# Altium PCB USB PROGRAMMER.PCBDOC
Units mil, origin at the board's own origin, x right, y up, seen from the top; angles counter-clockwise.
Board outline 1375 x 700 mil, 2 copper layers (Top Layer, Bottom Layer); 37 components, 36 nets, 141 pads, 0 vias.
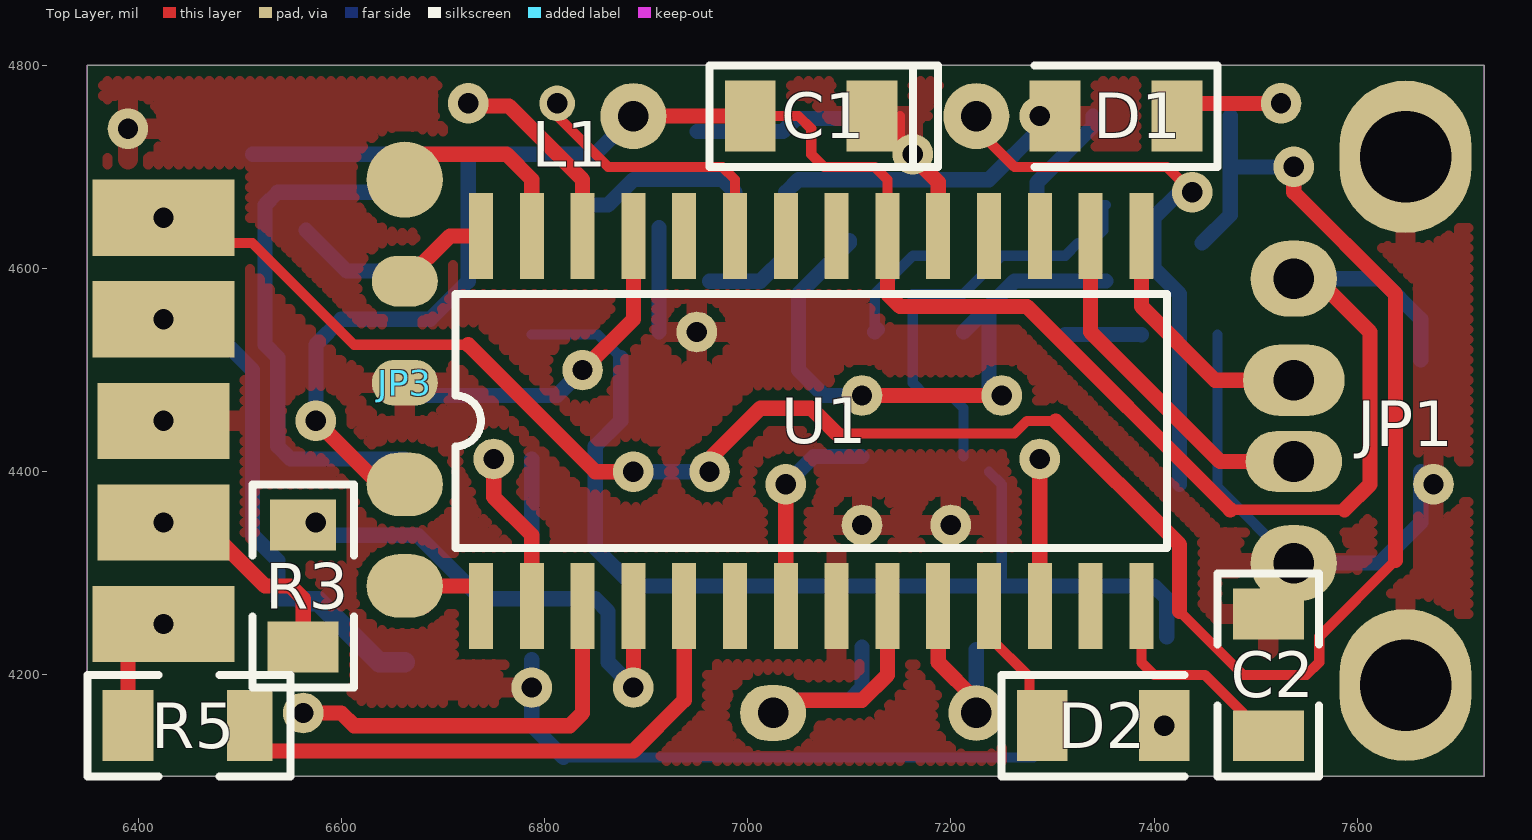
[diagram p0: Top Layer view]
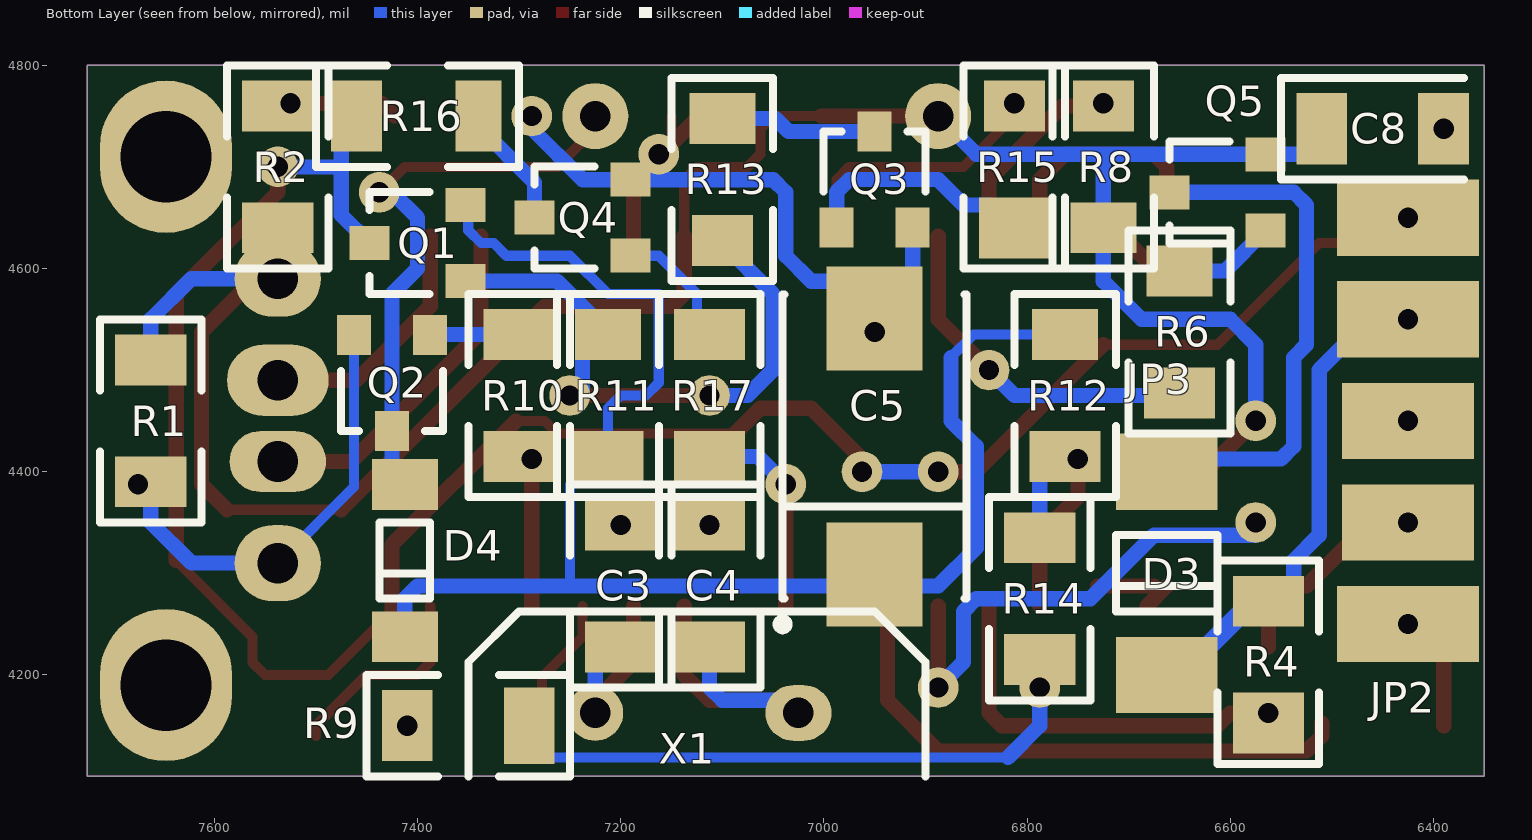
[diagram p1: Bottom Layer view, seen from below]

## Layer stack, top to bottom
Top Layer: signal copper 1.4
Dielectric: dielectric 12.6, FR-4, Dk 4.8
Bottom Layer: signal copper 1.4

## Board outline
7725,4100 7725,4800 6350,4800 6350,4100

## Design rules (kind name [scope] priority, off if disabled: settings)
Clearance [All] p1: gap=10
FabricationTestPointUsage TestPointUsage [All] p1: valid=0 allowmultiple=FALSE
FabricationTestpoint Testpoint [All] p1: side=3 testpointundercomponent=TRUE minsize=40 maxsize=100 preferedsize=60 minholesize=0 maxholesize=40 preferedholesize=32 testpointgrid=1 allowsidetop=TRUE allowsidebottom=TRUE usegrid=TRUE gridtolerance=0.01
PlaneConnect [All] p1: planeconnectstyle=Relief reliefexpansion=20 reliefentries=4 reliefconductorwidth=20 reliefairgap=10
PolygonConnect [All] p1: connectstyle=Relief reliefconductorwidth=20 reliefentries=4 polygonreliefangle="90 Angle"
RoutingVias [All] p1: holewidth=28 width=50 viastyle="Through Hole" minholewidth=28 minwidth=50 maxholewidth=28 maxwidth=50
SilkscreenOverComponentPads [All] p1: minsilkscreentomaskgap=10
SolderMaskExpansion [All] p1: expansion=4
Width [All] p1: maxlimit=20 minlimit=10 preferedwidth=20 bottomlayer_prefwidth=15 minimp=50.000000 maximp=50.000000 favimp=50.000000
24 further rules are at their usual default settings.

## Classes and differential pairs
component class 03: C5 D4 L1 Q1 Q2 Q3 Q4 R10 R11 R12 R13 R14 R15 R16 R17
component class 02: C8 D1 D2 D3 JP2 JP3 Q5 R1 R2 R3 R5 R6 R8 R9
component class 01: C1 C2 C3 C4 JP1 R4 U1 X1

## Components (designator, comment, footprint, x,y, rotation, side; value= is the part's Value field where it differs from the comment)
C1 "Cap" 1206NP#1 7062.5,4750 r180 top
C2 "Cap" 1206NP#1 7512.5,4200 r270 top
C3 "Cap" 1206NP#1 7200,4287.5 r270 bottom
C4 "Cap" 1206NP#1 7112.5,4287.5 r90 bottom
C5 "47uF" D 6950,4425 r90 bottom
C8 "Cap Pol" 1206P 6450,4737.5 r180 bottom
D1 "LED" 1206P 7362.5,4750 r180 top
D2 "LED" 1206p 7350,4150 r0 top
D3 "SS34" D64 6662.5,4300 r90 bottom
D4 "1N4148" DSMD1MM 7412.5,4312.5 r90 bottom
JP1 "USB MALE" USB_A_MALE 7537.5,4450 r90 top
JP2 "Header5x1" HDR5x1#1 6425,4650 r270 bottom
JP3 "Header5x1" HDR5x1#2 6662.5,4287.5 r90 bottom
L1 "" RES300TH 7075,4750 r0 top
Q1 "BC857" SOT23 7400,4625 r90 bottom
Q2 "BC848" SOT23 7425,4487.5 r0 bottom
Q3 "BC848" SOT23 6950,4687.5 r180 bottom
Q4 "BC848" SOT23 7237.5,4650 r90 bottom
Q5 "BC857" SOT23 6612.5,4675 r90 bottom
R1 "Res" 1206NP#1 7662.5,4450 r270 bottom
R2 "Res" 1206NP#1 7537.5,4700 r270 bottom
R3 "Res" 1206NP#2 6562.5,4287.5 r270 top
R4 "Res" 1206NP#3 6562.5,4212.5 r90 bottom
R5 "Res" 1206NP#4 6450,4150 r180 top
R6 "Res" 1206np#1 6650,4537.5 r270 bottom
R8 "Res" 1206NP#5 6725,4700 r270 bottom
R9 "Res" 1206NP#6 7350,4150 r0 bottom
R10 "Res" 1206NP#1 7300,4475 r270 bottom
R11 "Res" 1206NP#2 7212.5,4475 r270 bottom
R12 "Res" 1206NP#7 6762.5,4475 r90 bottom
R13 "Res" 1206NP#8 7100,4687.5 r270 bottom
R14 "Res" 1206NP#1 6787.5,4275 r90 bottom
R15 "Res" 1206NP#9 6812.5,4700 r90 bottom
R16 "Res" 1206NP#4 7400,4750 r0 bottom
R17 "Res" 1206np#2 7112.5,4475 r270 bottom
U1 "" soic28 6962.5,4450 r0 top
X1 "XTAL" XTAL1 7125,4162.5 r180 bottom

## Footprints (in the part's own frame and the unit in brackets; to place one, negate y for a bottom-side part, rotate by r counter-clockwise, add the part's x,y. Pads: shape width x height; smd on the part's side, far side on the other; paste and mask are expansions set on the pad)
1206NP#1 [mil]
  rect 50x70 smd: 1(-60,0) 2(60,0)
  silkscreen extent -100,-50 100,50
1206NP#2 [mil]
  rect 50x65 smd: 1(-60,0)
  rect 50x70 smd: 2(60,0)
  silkscreen extent -100,-50 100,50
1206NP#3 [mil]
  rect 60x70 smd: 1(-60,0)
  rect 50x70 smd: 2(60,0)
  silkscreen extent -100,-50 100,50
1206NP#4 [mil]
  rect 45x70 smd: 1(-60,0)
  rect 50x70 smd: 2(60,0)
  silkscreen extent -100,-50 100,50
1206NP#5 [mil]
  rect 50x60 smd: 1(-60,0)
  rect 50x65 smd: 2(60,0)
  silkscreen extent -100,-50 100,50
1206NP#6 [mil]
  rect 50x75 smd: 1(-60,0)
  rect 50x70 smd: 2(60,0)
  silkscreen extent -100,-50 100,50
1206NP#7 [mil]
  rect 50x70 smd: 1(-60,0)
  rect 50x65 smd: 2(60,0)
  silkscreen extent -100,-50 100,50
1206NP#8 [mil]
  rect 50x65 smd: 1(-60,0)
  rect 50x60 smd: 2(60,0)
  silkscreen extent -100,-50 100,50
1206NP#9 [mil]
  rect 60x70 smd: 1(-60,0)
  rect 50x60 smd: 2(60,0)
  silkscreen extent -100,-50 100,50
1206np#1 [mil]
  rect 50x65 smd: 1(-60,0)
  rect 50x70 smd: 2(60,0)
  silkscreen extent -100,-50 100,50
1206np#2 [mil]
  rect 50x70 smd: 1(-60,0) 2(60,0)
  silkscreen extent -100,-50 100,50
1206P [mil]
  rect 50x70 smd: 1(-60,0) 2(60,0)
  silkscreen extent -100,-50 80,50
1206p [mil]
  rect 50x70 smd: 1(-60,0) 2(60,0)
  silkscreen extent -100,-50 80,50
D [mm] "Capacitor, SM Tantalum; Body 7.3 x 4.3 mm (LxW typ)"
  rect 2.6x2.4 smd: 1(-3.2,0) 2(3.2,0)
  silkscreen extent -4.57,-2.3 3.8,2.43
D64 [mil]
  rect 75x100 smd: 1(100,0) 2(-100,0)
  silkscreen extent -38,-50 38,50
DSMD1MM [mil] "DIODO SMD"
  rect 50x65 smd: 1(75,0) 2(-75,0)
  silkscreen extent -38,-25 38,25
HDR5x1#1 [mil] "HEADER 5x1"
  rect 75x140 hole 20: 1(0,0) 2(100,0) 5(400,0)
  rect 75x130 hole 20: 3(200,0) 4(300,0)
HDR5x1#2 [mil] "HEADER 5x1"
  oval 62.5x75 smd far side: 1(0,0) 2(100,0)
  oval 45x65 smd far side: 3(200,0)
  oval 50x65 smd far side: 4(300,0)
  round 75 smd far side: 5(400,0)
RES300TH [mil] "RESISTENCIA THROUGH-HOLE"
  round 65 hole 30: 1(-187.5,0) 2(150,0)
  silkscreen extent -112,-50 112,50
soic28 [mm]
  rect 0.6x2.15 smd: 1(-5.715,-4.625) 2(-4.445,-4.625) 3(-3.175,-4.625) 4(-1.905,-4.625) 5(-0.635,-4.625) 6(0.635,-4.625) 7(1.905,-4.625) 8(3.175,-4.625) 9(4.445,-4.625) 10(5.715,-4.625) 11(6.985,-4.625) 12(8.255,-4.625) 13(9.525,-4.625) 14(10.795,-4.625) 15(10.795,4.625) 16(9.525,4.625) 17(8.255,4.625) 18(6.985,4.625) 19(5.715,4.625) 20(4.445,4.625) 21(3.175,4.625) 22(1.905,4.625) 23(0.635,4.625) 24(-0.635,4.625) 25(-1.905,4.625) 26(-3.175,4.625) 27(-4.445,4.625) 28(-5.715,4.625)
  silkscreen extent -6.35,-3.17 11.43,3.17
SOT23 [mm] "SOT23"
  rect 0.85x1 smd: 1(-0.95,-1.2) 2(0.95,-1.2) 3(0,1.2)
  silkscreen extent -1.27,-0.3 1.28,1.2
USB_A_MALE [mil]
  oval 75x85 hole 40: 1(140,0) 4(-140,0)
  oval 70x100 hole 40: 2(40,0)
  oval 60x95 hole 40: 3(-40,0)
  oval 150x130 hole 90: 5(260,-110) 6(-260,-110)
XTAL1 [mil] "CRISTAL DE CUARZO"
  round 55 hole 30: 1(-100,0)
  oval 65x55 hole 30: 2(100,0)
  silkscreen extent -225,-63 225,100

## Part data
C1 C2 C3 C4: "Capacitor"
C5: library part T491D, "Solid Tantalum Chip Capacitor, Standard T491 Series - Industrial Grade"
C8: "Capacitor Polarizado"
D1 D2: "Led"
D3: library part 1N5822, "Schottky Diode 3A 40V"
D4: "High Conductance Fast Diode"
JP1: library part USB, "USB Connector"
JP2 JP3: "Header 5x1"
L1: library part Inductor, "Inductor"
Q1 Q5: library part BC856A, "100mA 65V PNP Bipolar Transistor"
Q2 Q3 Q4: library part BC846A, "100mA 65V NPN Bipolar Transistor"
R1 R2 R3 R4 R5 R6 R8 R9 R10 R11 R12 R13 R14 R15 R16 R17: "Resistor"
U1: library part PIC18F2550, "Enhanced FLASH Microcontroller"
X1: "Crystal Oscillator"

## Free pads (board coordinates)
  round 40 hole 20: 0(6390,4737.5) 0(6562.5,4162.5) 0(6575,4450) 0(6950,4537.5) 0(7112.5,4475) 0(7250,4475) 1(6725,4762.5) 1(6887.5,4400) 1(7200,4347.5) 2(6962.5,4400) 2(7112.5,4347.5) 3(6887.5,4187.5) 3(7287.5,4412.5) 3(7675,4387.5) 4(6575,4350) 4(6787.5,4187.5) 4(7287.5,4750) 4(7410,4150) 5(7037.5,4387.5) 5(7162.5,4712.5) 5(7437.5,4675) 7(6750,4412.5) 8(6837.5,4500) 10(7525,4762.5) 11(7537.5,4700)
  round 35 hole 20: 9(6812.5,4762.5)

## Nets (pads, with @x,y where several pads share a name; then routed paths per layer and width w, separated by ;. In a path a pad name is that pad's centre, name@x,y a point inside that pad or via, vN(x,y) a via of type N, cw(c..) or ccw(c..) an arc to the next point about the centre after c; other vN are vias at no path point)
BSY: D2.1 U1.11 | length 146.4
  Top Layer w10: U1.11 7237.5,4237.5 7277.5,4197.5 7277.5,4151.01 7278.51,4150 D2.1
D+: JP1.3 U1.16 | length 347.4
  Top Layer w15: U1.16 7337.5,4537.5 7465,4410 JP1.3
D-: JP1.2 U1.15 | length 249.6
  Top Layer w15: U1.15 7387.5,4562.5 7460,4490 JP1.2
GND: C1.1 C2.1 C3.1 C4.2 C5.2 C8.2 D1.2 JP1.4 JP1.5 JP1.6 JP2.3 JP3.3 pad.0@6390,4737.5 pad.0@6950,4537.5 pad.1@7200,4347.5 pad.2@7112.5,4347.5 pad.3@7675,4387.5 pad.4@6787.5,4187.5 pad.4@7287.5,4750 pad.5@7162.5,4712.5 Q2.2 Q3.2 Q4.2 R1.2 R9.1 R14.1 U1.8 U1.19 | length 1736.8
  Top Layer w10: pad.5@7150,4725 7150,4750
  Top Layer w15: C1.1 7187.5,4685 U1.19
  Bottom Layer w10: 6818.75,4118.75 7281.25,4118.75 R9.1@7287.5,4125 ; Q2.2 7462.4,4385.1 JP1.4
  Bottom Layer w15: R14.1 6787.5,4150 6818.75,4118.75 ; C5.2@6912.6,4537.5 Q3.2 ; C5.2@6962.5,4587.5 7012.5,4587.5 7037.5,4612.5 7037.5,4675 7049.9,4687.4 7237.4,4687.4 7287.5,4737.5 pad.4@7287.5,4750 ; JP1.4 7622.5,4310 7662.5,4350 R1.2@7662.5,4400
ICSPCLK: R5.1 U1.5 | length 559.8
  Top Layer w15: R5.1@6510,4152.5 6510,4140 6525,4125 6887.5,4125 6937.5,4175 U1.5
ICSPDAT: pad.3@6887.5,4187.5 pad.4@6575,4350 R3.1 U1.4 | length 484.3
  Top Layer w15: pad.3@6887.5,4187.5 U1.4
  Bottom Layer w15: pad.4@6575,4337.5 6675,4337.5 6737.5,4275 6850,4275 6862.5,4262.5 6862.5,4212.5 pad.3@6887.5,4187.5
MCLR: JP3.1 U1.1 | length 83.1
  Top Layer w15: JP3.1 JP3.1@6682.09,4267.91 ; JP3.1@6675,4287.5 U1.1@6730.41,4287.5
MCLRTGT: pad.5@7037.5,4387.5 R17.2 U1.7 | length 206
  Top Layer w15: U1.7 pad.5@7037.5,4387.5
  Bottom Layer w15: pad.5@7037.5,4387.5 7065,4415 R17.2
NetC2_2: C2.2 U1.14 | length 203.8
  Top Layer w10: U1.14 7387.5,4212.5 7400,4200 7450,4200 7500,4150 C2.2@7500,4140
NetC3_2: C3.2 U1.10 X1.1 | length 170.9
  Top Layer w15: U1.10 7187.5,4212.5 X1.1@7225,4175
  Bottom Layer w15: X1.1 C3.2@7225,4225
NetC4_1: C4.1 U1.9 X1.2 | length 323.4
  Top Layer w15: X1.2@7025,4175 7112.5,4175 7137.5,4200 U1.9
  Bottom Layer w15: X1.2@7025,4175 7100,4175 7112.5,4187.5 C4.1
NetC5_1: C5.1 D4.2 Q1.2 R11.2 R12.2 | length 1469.6
  Bottom Layer w10: R12.2@6787.5,4535 6852.5,4535 6875,4512.5 ; R11.2 7212.5,4462.5 7200,4475 7175,4475 7162.5,4487.5 7162.5,4575 7212.5,4575 7250,4612.5 7312.5,4612.5 7325,4625 7337.5,4625 7350,4637.5 7350,4662.5 7352.66,4662.5 Q1.2 ; R11.2@7237.5,4400 7250,4387.5 7250,4287.5
  Bottom Layer w15: 6875,4512.5 6875,4450 6850,4425 6850,4325 6887.5,4287.5 7400,4287.5 7412.5,4275 D4.2
NetD1_1: D1.1 pad.10 R2.1 | length 107.7
  Top Layer w15: D1.1 7435,4762.5 pad.10
NetD2_2: D2.2 pad.4@7410,4150 R9.2
NetD3_1: D3.1 Q5.3 | length 512.8
  Bottom Layer w15: Q5.3 6537.5,4675 6525,4662.5 6525,4525 6537.5,4512.5 6537.5,4425 6550,4412.5 D3.1@6662.5,4412.5
NetD4_1: D4.1 L1.2 pad.5@7437.5,4675 Q2.3 | length 571.6
  Top Layer w10: L1.2 7225,4737.5 7262.5,4700 7412.5,4700 pad.5@7437.5,4675
  Bottom Layer w15: D4.1@7425,4387.5 7425,4575 7400,4600 7400,4650 7425,4675 pad.5@7437.5,4675
NetQ1_2: pad.0@7112.5,4475 pad.0@7250,4475 Q1.1 R11.1 R13.2 | length 606.3
  Top Layer w15: pad.0@7112.5,4475 pad.0@7250,4475
  Bottom Layer w15: R13.2@7098.75,4626.25 R13.2 ; R13.2@7100,4625 7050,4575 7050,4500 7075,4475 pad.0@7112.5,4475 ; R11.1@7212.5,4537.5 7262.6,4587.6 Q1.1 ; pad.0@7237.5,4475 7237.5,4562.5
NetQ2_2: Q2.1 R10.1 | length 77.7
  Bottom Layer w15: R10.1@7312.5,4535 R10.1@7327.5,4535 ; R10.1@7325,4535 7387.34,4535 Q2.1
NetQ3_1: Q3.3 R13.1 | length 155.3
  Bottom Layer w15: Q3.3 7034.74,4734.74 7047.5,4747.5 R13.1
NetQ3_2: Q3.1 R15.1 | length 200.2
  Bottom Layer w15: R15.1@6837.5,4662.5 6862.5,4662.5 6887.5,4687.5 6975,4687.5 6987.4,4675.1 Q3.1
NetQ4_1: Q4.3 R16.1 | length 122.9
  Bottom Layer w15: Q4.3 7284.74,4684.74 7340,4740 R16.1
NetQ4_2: Q4.1 R17.1 | length 121.9
  Bottom Layer w10: R17.1@7125,4537.5 7125,4575 7162.6,4612.6 Q4.1
  Bottom Layer w15: R17.1@7125,4537.5 R17.1@7127.5,4540
NetQ5_2: Q5.1 R6.1 | length 101.4
  Bottom Layer w15: Q5.1 6605.35,4597.5 R6.1
PGC: JP3.5 U1.27 | length 208.4
  Top Layer w15: JP3.5 6662.5,4700 6675,4712.5 6762.5,4712.5 6787.5,4687.5 U1.27
PGD: JP3.4 U1.28 | length 93.5
  Top Layer w15: JP3.4 6707.09,4632.09 U1.28
SW: pad.1@6725,4762.5 R8.1 U1.26 | length 197.9
  Top Layer w15: pad.1@6725,4760 6765,4760 6837.5,4687.5 U1.26
VCC: C1.2 C8.1 JP1.1 JP3.2 L1.1 pad.0@6575,4450 Q5.2 R1.1 R2.2 R8.2 U1.20 | length 2284.5
  Top Layer w10: C1.2 7050,4750 7062.5,4737.5 7062.5,4712.5 7075,4700 7125,4700 7137.5,4687.5 U1.20 ; 7475,4362.5 7587.5,4362.5
  Top Layer w15: pad.0@6575,4450 6637.5,4387.5 JP3.2 ; L1.1 C1.2 ; U1.20 7137.5,4575 7150,4562.5 7275,4562.5 7475,4362.5 ; JP1.1 7560,4590 7612.5,4537.5 7612.5,4387.5 7587.5,4362.5
  Bottom Layer w15: C8.1@6512.5,4712.5 6850,4712.5 L1.1 ; pad.0@6575,4450 6575,4525 6600,4550 6687.5,4550 6725,4587.5 6725,4712.5 ; JP1.1 7622.5,4590 7662.5,4550 R1.1
VDDTGT: D3.2 JP2.2 R4.2 | length 446.6
  Bottom Layer w15: JP2.2@6462.5,4525 6487.5,4525 6512.5,4500 6512.5,4337.5 6537.5,4312.5 6537.5,4275 6560,4275 R4.2
  Bottom Layer w20: R4.2 6577.5,4272.5 6637.5,4212.5 D3.2@6662.5,4212.5
VDDTGTFB: pad.0@6562.5,4162.5 R4.1 U1.3 | length 390.8
  Top Layer w15: pad.0@6562.5,4162.5 6600,4162.5 6612.5,4150 6825,4150 6837.5,4162.5 U1.3
VDDTGTP: pad.8 R6.2 U1.25 | length 335.7
  Top Layer w15: pad.8 6887.5,4550 U1.25
  Bottom Layer w15: R6.2@6665,4475 6812.5,4475 pad.8
VPPFB: pad.7 R12.1 R14.2 U1.2 | length 237.6
  Top Layer w15: pad.7 6750,4375 6787.5,4337.5 U1.2
  Bottom Layer w15: R14.2 R12.1@6787.5,4412.5
VPPON: pad.9 R15.2 U1.23 | length 268.8
  Top Layer w10: pad.9 6812.5,4750 6862.5,4700 6975,4700 6987.5,4687.5 U1.23
VPPPUMP: pad.3@7287.5,4412.5 R10.2 U1.12 | length 144.6
  Top Layer w15: U1.12 pad.3@7287.5,4412.5
XICSPCLK: JP2.5 R5.2 | length 90
  Top Layer w15: R5.2 JP2.5@6390,4240
XICSPDAT: JP2.4 R3.2 | length 178.6
  Top Layer w15: JP2.4@6462.5,4350 6525,4287.5 6550,4287.5 6562.5,4275 R3.2
XVPP: JP2.1 pad.1@6887.5,4400 pad.2@6962.5,4400 pad.11 Q1.3 R16.2 | length 2196
  Top Layer w10: JP2.1 6450,4625 6512.5,4625 6612.5,4525 6725,4525 ; 7087.5,4437.5 7262.5,4437.5 7275,4450 7303.12,4450 ; 7425,4262.5 7487.5,4200 7550,4200 7562.5,4212.5 7562.5,4237.5 7637.5,4312.5
  Top Layer w15: 6725,4525 6850,4400 pad.1@6887.5,4400 ; pad.2@6962.5,4400 6962.5,4412.5 7012.5,4462.5 7062.5,4462.5 7087.5,4437.5 ; 7303.12,4450 7425,4328.12 7425,4262.5 ; pad.11 7537.5,4675 7637.5,4575 7637.5,4312.5
  Bottom Layer w15: pad.1@6887.5,4400 pad.2@6962.5,4400 ; Q1.3 7475,4652.76 R16.2@7475,4750 ; 7475,4700 pad.11
pads on no net: U1.6 U1.13 U1.17 U1.18 U1.21 U1.22 U1.24

## Polygon pours and split planes (outlines as drawn)
GND on Top Layer "Top Layer-GND 1" (hatched 90Degree grid 10 track 10, remove dead copper, pour order 1000): 6350,4100 7725,4100 7725,4800 6350,4800

## Keep-outs
Keep-Out Layer:
  the board outline again, w1

## Silkscreen, mask and mechanical layers (free items; w line width, h text height)
Mechanical 1:
  the board outline again, w15
Mechanical 2:
  the board outline again, w15

## Dimensions
7725,4100 to 7737.5,4800 on Mechanical 1
7725,4100 to 6350,4100 on Mechanical 1